# EAGLE board shield board (EAGLE 9.5.1)
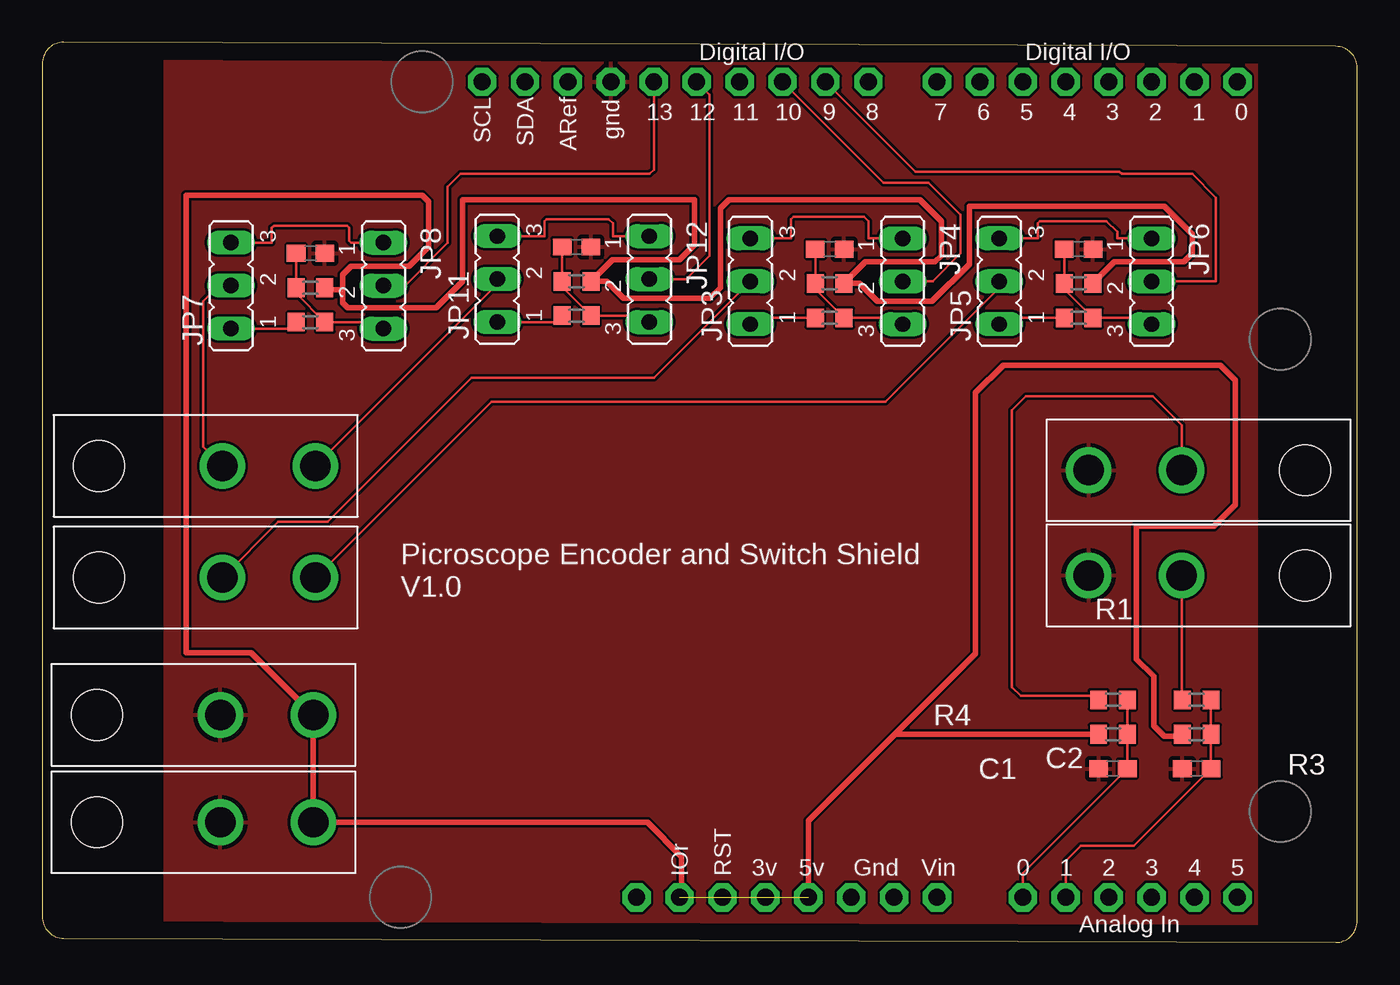
[diagram p0: board, top side]
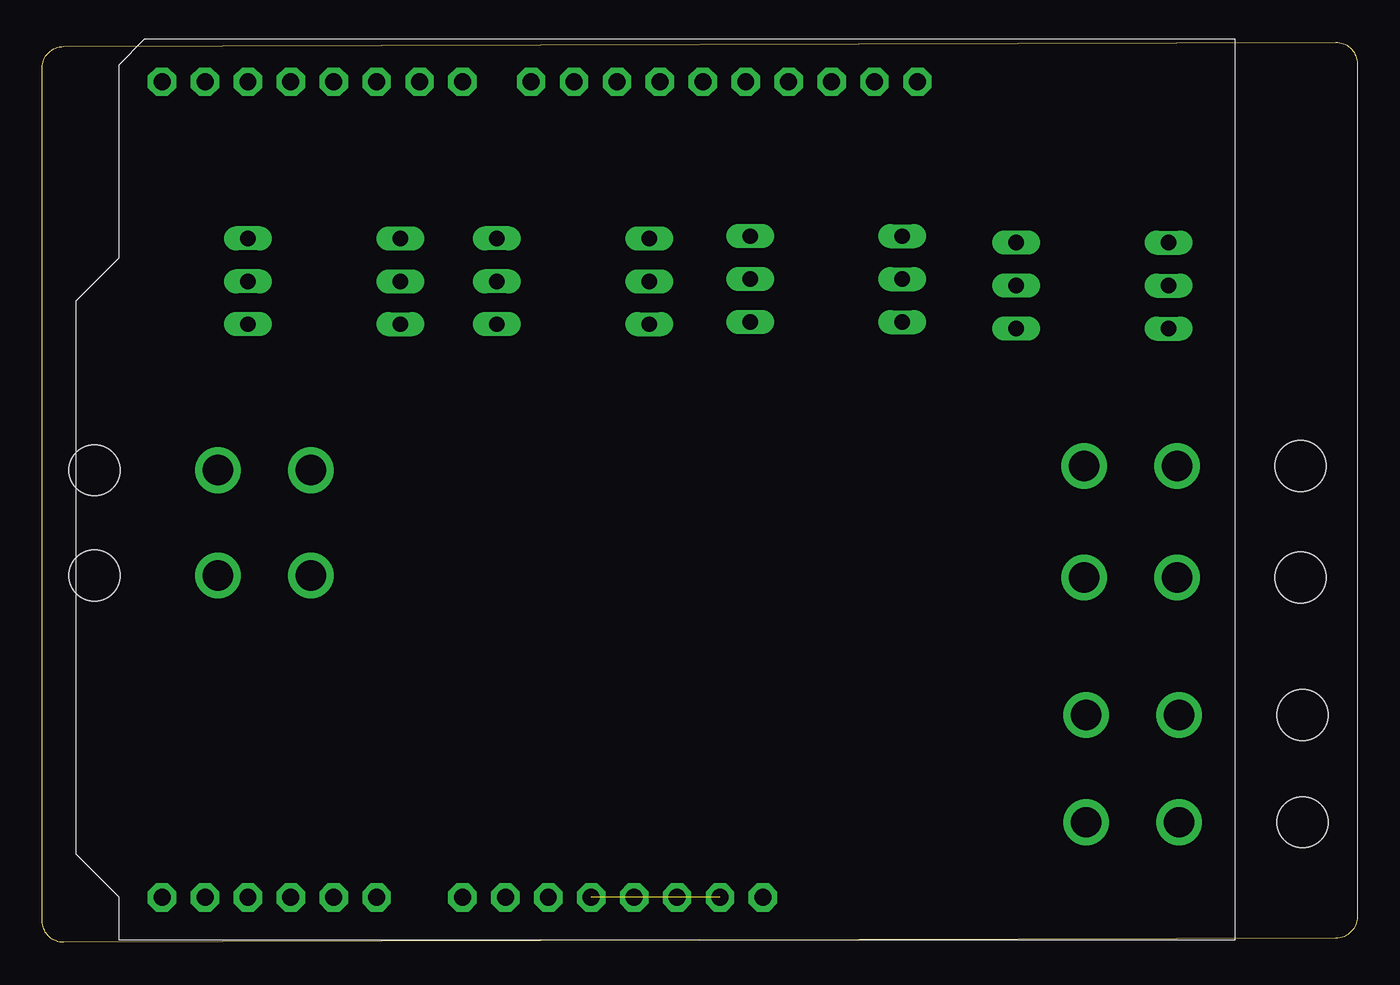
[diagram p1: board, bottom side, seen from below]

Size 77.83 x 53.26 mm. Coordinates in mm from the lower left corner, seen from the top.
Outline: 76.56,53.01 1.27,53.26 arc90 0,51.99 0,1.52 arc90 1.27,0.25 76.56,0 arc90 77.83,1.27 77.83,51.74 arc90 76.56,53.01
Copper layers (1*16): Top 0.035mm / dielectric 1.5mm / Bottom 0.035mm
Design rules "default": minimum track width 6mil, minimum drill 0.35mm, track to track 6mil, track to pad 6mil, pad to pad 6mil, via to via 6mil, smd to smd 6mil, copper to edge 40mil, drill to drill 6mil, minimum pad ring 10mil, minimum via ring 8mil, stop-mask expansion 4mil, vias tented up to drill 0mil, thermal gap 10mil

## Footprints (pad centres in the part's own frame; a part is rotated, then mirrored left to right if it is on the bottom)
C0603 = smd 1.1 x 1: 1 -0.85,0; 2 0.85,0
JP2 = drill 0.914 long: 1 -2.54,0; 2 0,0; 3 2.54,0
R0603 = smd 1 x 1.1: 1 -0.85,0; 2 0.85,0
ARDUINOR3-BPLACE = drill 1 pad 1.676 octagon: 3V 35.56,2.54; 5V 38.1,2.54; A0 50.8,2.54; A1 53.34,2.54; A2 55.88,2.54; A3 58.42,2.54; A4 60.96,2.54; A5 63.5,2.54; AREF 23.876,50.8; D0 63.5,50.8; D1 60.96,50.8; D2 58.42,50.8; D3 55.88,50.8; D4 53.34,50.8; D5 50.8,50.8; D6 48.26,50.8; D7 45.72,50.8; D8 41.656,50.8; D9 39.116,50.8; D10 36.576,50.8; D11 34.036,50.8; D12 31.496,50.8; D13 28.956,50.8; GND 26.416,50.8; GND1 43.18,2.54; GND2 40.64,2.54; IOREF 30.48,2.54; RESERVED 27.94,2.54; RESET 33.02,2.54; SCL 18.796,50.8; SDA 21.336,50.8; VIN 45.72,2.54
MINI-FIT_JR_CONN = drill 1.8: P$1 0,0; P$2 0,5.5 | hole 3: 0,-7.3

## Placement (x,y rotation side)
C1  0.1uF  [C0603]  63.37,10.28 180 top
C2  0.1uF  [C0603]  68.33,10.28 180 top
C4  0.1uF  [C0603]  61.34,41.02 0 top
C5  0.1uF  [C0603]  46.61,41.02 0 top
C6  0.1uF  [C0603]  15.88,40.76 0 top
C8  0.1uF  [C0603]  31.62,41.14 0 top
JP3  [JP2]  41.91,39.11 90 top
JP4  [JP2]  50.93,39.11 270 top
JP5  [JP2]  56.64,39.11 90 top
JP6  [JP2]  65.66,39.11 270 top
JP7  [JP2]  11.18,38.86 90 top
JP8  [JP2]  20.19,38.86 270 top
JP11  [JP2]  26.92,39.24 90 top
JP12  [JP2]  35.94,39.24 270 top
R1  1k  [R0603]  68.33,14.35 0 top
R2  10k  [R0603]  68.33,12.31 180 top
R3  1k  [R0603]  63.37,14.35 0 top
R4  10k  [R0603]  63.37,12.31 180 top
R7  1k  [R0603]  61.34,36.95 0 top
R8  10k  [R0603]  61.34,38.98 0 top
R9  1k  [R0603]  46.61,36.95 0 top
R10  10k  [R0603]  46.61,38.98 0 top
R11  1k  [R0603]  15.88,36.7 0 top
R12  10k  [R0603]  15.88,38.73 0 top
R15  1k  [R0603]  31.62,37.08 0 top
R16  10k  [R0603]  31.62,39.11 0 top
U1  ARDUINOR3-BPLACE  [ARDUINOR3-BPLACE]  7.24,0.12 0 top
U$1  MOLEX_0039301022  [MINI-FIT_JR_CONN]  67.44,21.71 90 top
U$2  MOLEX_0039301022  [MINI-FIT_JR_CONN]  67.44,27.94 90 top
U$3  MOLEX_0039301022  [MINI-FIT_JR_CONN]  10.54,7.11 270 top
U$4  MOLEX_0039301022  [MINI-FIT_JR_CONN]  10.54,13.46 270 top
U$5  MOLEX_0039301022  [MINI-FIT_JR_CONN]  10.67,28.19 270 top
U$6  MOLEX_0039301022  [MINI-FIT_JR_CONN]  10.67,21.59 270 top

## Library data of the parts
C1 C2 C4-C6 C8 U1 = adafruit
JP3-JP8 JP11 JP12 = jumper
R1-R4 R7-R12 R15 R16 = resistor
U$1-U$6 = pat

## Nets
3V: U1.3V
E1CHA: JP12.2 U1.D12
E1CHA_BYPASS: JP11.3 JP12.1
E1CHA_DB: C8.1 JP12.3 R15.2 R16.1
E1CHA_RAW: JP11.2 U$5.P$2
E1CHB: JP8.2 U1.D13
E1CHB_BYPASS: JP7.3 JP8.1
E1CHB_DB: C6.1 JP8.3 R11.2 R12.1
E1CHB_RAW: JP7.2 U$5.P$1
E2CHA: JP6.2 U1.D9
E2CHA_BYPASS: JP5.3 JP6.1
E2CHA_DB: C4.1 JP6.3 R7.2 R8.1
E2CHA_RAW: JP5.2 U$6.P$2
E2CHB: JP4.2 U1.D10
E2CHB_BYPASS: JP3.3 JP4.1
E2CHB_DB: C5.1 JP4.3 R9.2 R10.1
E2CHB_RAW: JP3.2 U$6.P$1
GND: C1.2 C2.2 C4.2 C5.2 C6.2 C8.2 U1.GND U$1.P$2 U$2.P$2 U$3.P$1 U$4.P$1
GND1: U1.GND1
GND2: U1.GND2
N$1: R1.1 U$1.P$1
N$3: JP5.1 R7.1
N$4: R3.1 U$2.P$1
N$5: JP3.1 R9.1
N$6: JP7.1 R11.1
N$8: JP11.1 R15.1
SW_X: C1.1 R3.2 R4.1 U1.A0
SW_Y: C2.1 R1.2 R2.1 U1.A1
VCC: R2.2 R4.2 R8.2 R10.2 R12.2 R16.2 U1.5V U1.IOREF U$3.P$2 U$4.P$2
VIN: U1.VIN

## Tracks (layer width: path | path; a pad name or v marks a point on that pad's centre or on a via)
E1CHA
  Top 0.152: JP12.2 38.1,39.24 39.5,40.64 39.5,50.16 U1.D12
E1CHA_BYPASS
  Top 0.152: JP11.3 29.72,41.78 29.72,42.67 29.85,42.79 33.53,42.79 33.78,42.54 33.78,41.78 JP12.1
E1CHA_DB
  Top 0.152: JP12.3 35.56,37.08 R15.2 30.77,38.78 R16.1 C8.1
E1CHA_RAW
  Top 0.152: JP11.2 26.92,38.95 U$5.P$2
E1CHB
  Top 0.152: U1.D13 36.2,45.72 35.94,45.46 24.77,45.46 24,44.7 24,41.4 21.46,38.86 JP8.2
E1CHB_BYPASS
  Top 0.152: JP8.1 18.29,41.4 18.16,41.52 18.16,42.29 18.03,42.41 13.72,42.41 13.59,42.29 13.59,41.4 JP7.3
E1CHB_DB
  Top 0.152: JP8.3 19.81,36.7 R11.2 15.02,38.4 R12.1 C6.1
E1CHB_RAW
  Top 0.152: JP7.2 10.46,38.86 9.53,37.92 9.53,29.33 U$5.P$1
E2CHA
  Top 0.152: U1.D9 51.69,45.59 63.76,45.59 63.88,45.47 68.07,45.47 69.47,44.06 69.47,39.11 JP6.2
E2CHA_BYPASS
  Top 0.152: JP5.3 58.93,41.65 58.93,42.54 59.05,42.67 62.99,42.67 63.63,42.03 63.63,41.65 JP6.1
E2CHA_DB
  Top 0.152: JP6.3 65.28,36.95 R7.2 60.49,38.65 R8.1 C4.1
E2CHA_RAW
  Top 0.152: U$6.P$2 26.58,32 49.91,32 56.64,38.73 JP5.2
E2CHB
  Top 0.152: JP4.2 52.7,39.11 54.36,40.76 54.36,43.05 52.45,44.95 49.78,44.95 U1.D10
E2CHB_BYPASS
  Top 0.152: JP3.3 44.32,41.65 44.32,42.79 44.45,42.92 48.64,42.92 48.89,42.67 48.89,41.65 JP4.1
E2CHB_DB
  Top 0.152: JP4.3 50.55,36.95 R9.2 45.76,38.65 R10.1 C5.1
E2CHB_RAW
  Top 0.152: JP3.2 36.2,33.4 25.4,33.4 16.89,24.89 13.97,24.89 U$6.P$1
GND
  pour Top: 7.24,52.19 7.24,0.88 71.88,0.88 71.88,52.19
N$1
  Top 0.152: U$1.P$1 67.44,14.39 R1.1
N$3
  Top 0.152: JP5.1 57.02,36.95 R7.1
N$4
  Top 0.152: R3.1 62.23,14.35 61.98,14.6 57.91,14.6 57.4,15.11 57.4,31.49 58.23,32.32 65.72,32.32 67.44,30.6 U$2.P$1
N$5
  Top 0.152: JP3.1 42.29,36.95 R9.1
N$6
  Top 0.152: R11.1 14.64,36.32 11.89,36.32 JP7.1
N$8
  Top 0.152: JP11.1 30.39,36.7 R15.1
SW_X
  Top 0.152: R3.2 R4.1 C1.1 58.04,4.1 U1.A0
SW_Y
  Top 0.152: R1.2 R2.1 C2.1 64.6,5.71 61.47,5.71 60.58,4.82 U1.A1
VCC  (1 unrouted)
  Top 0.33: 67.8,12.31 67.69,12.31 | 67.69,12.31 R2.2 67.44,12.31 67.18,12.06 | U1.5V 45.34,7.18 50.47,12.31 | R4.2 50.47,12.31 | 17.78,38.6 16.85,38.6 R12.2 | R8.2 63.46,40.25 67.56,40.25 68.07,40.76 68.07,41.91 66.42,43.56 54.86,43.56 54.86,40.13 52.65,37.92 49.45,37.92 48.38,38.98 R10.2 48.73,40.25 52.83,40.25 53.21,40.64 53.21,42.67 51.94,43.94 40.64,43.94 40.13,43.43 40.13,38.73 39.5,38.1 34.42,38.1 33.4,39.11 R16.2 33.74,40.38 37.72,40.38 38.61,41.27 38.61,43.94 24.89,43.94 24.89,39.11 23.32,37.54 18.09,37.54 17.78,37.84 17.78,38.6 | U1.IOREF 37.85,2.79 37.85,5.08 35.81,7.11 U$3.P$2 U$4.P$2 12.36,17.14 8.51,17.14 8.51,44.19 22.48,44.19 22.86,43.81 22.86,41.14 21.72,40 18.29,40 17.78,39.49 17.78,38.6 | 50.47,12.31 55.24,17.09 55.24,32.51 56.9,34.16 69.72,34.16 70.61,33.27 70.61,25.9 69.34,24.63 64.77,24.63 64.77,16.76 65.79,15.74 65.79,12.82 66.42,12.19 67.56,12.19 67.69,12.31

## Text on the board
tPlace: Picroscope Encoder and Switch Shield / V1.0